# Altium PCB R6.PcbDoc (part 1 of 2)
Units mm, origin at the board's own origin, x right, y up, seen from the top; angles counter-clockwise.
Board outline 152.4 x 101.6 mm, 4 copper layers (Top Layer, GND, VDD, Bottom Layer), stack 0.925 mm thick; 92 components, 126 nets, 416 pads, 248 vias.
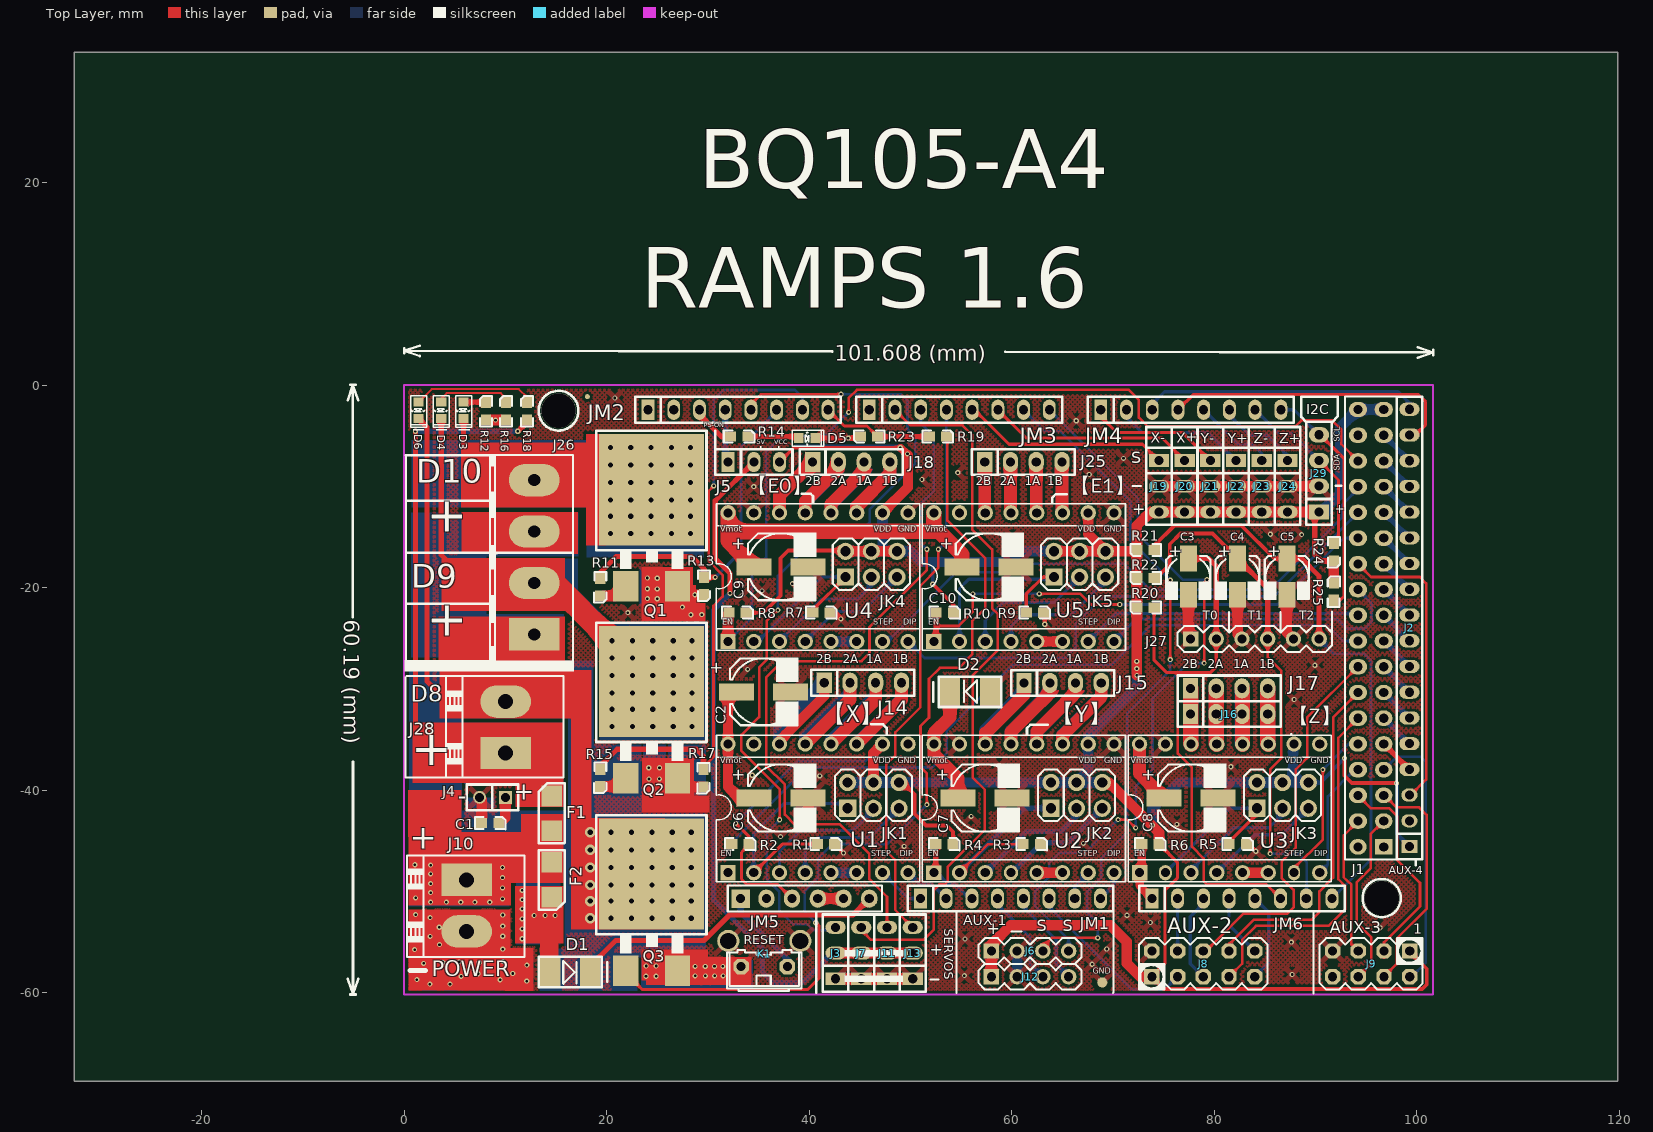
[diagram p0: Top Layer view]
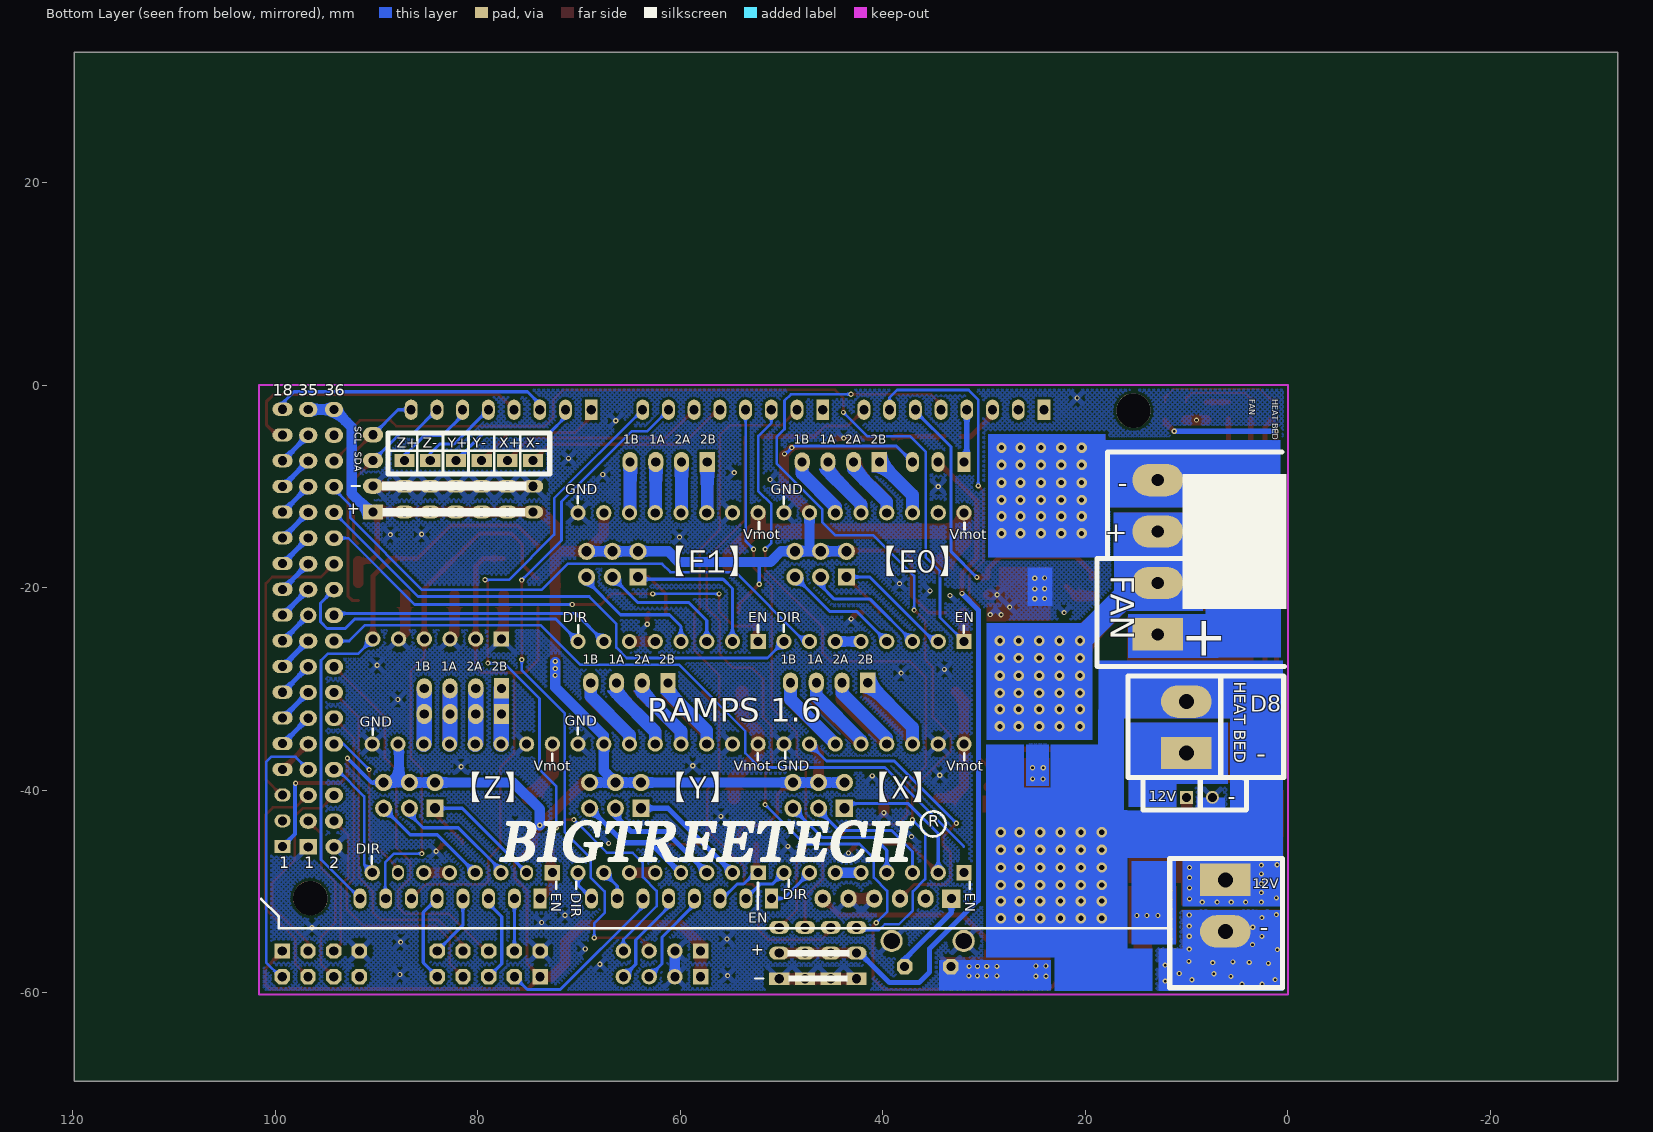
[diagram p1: Bottom Layer view, seen from below]
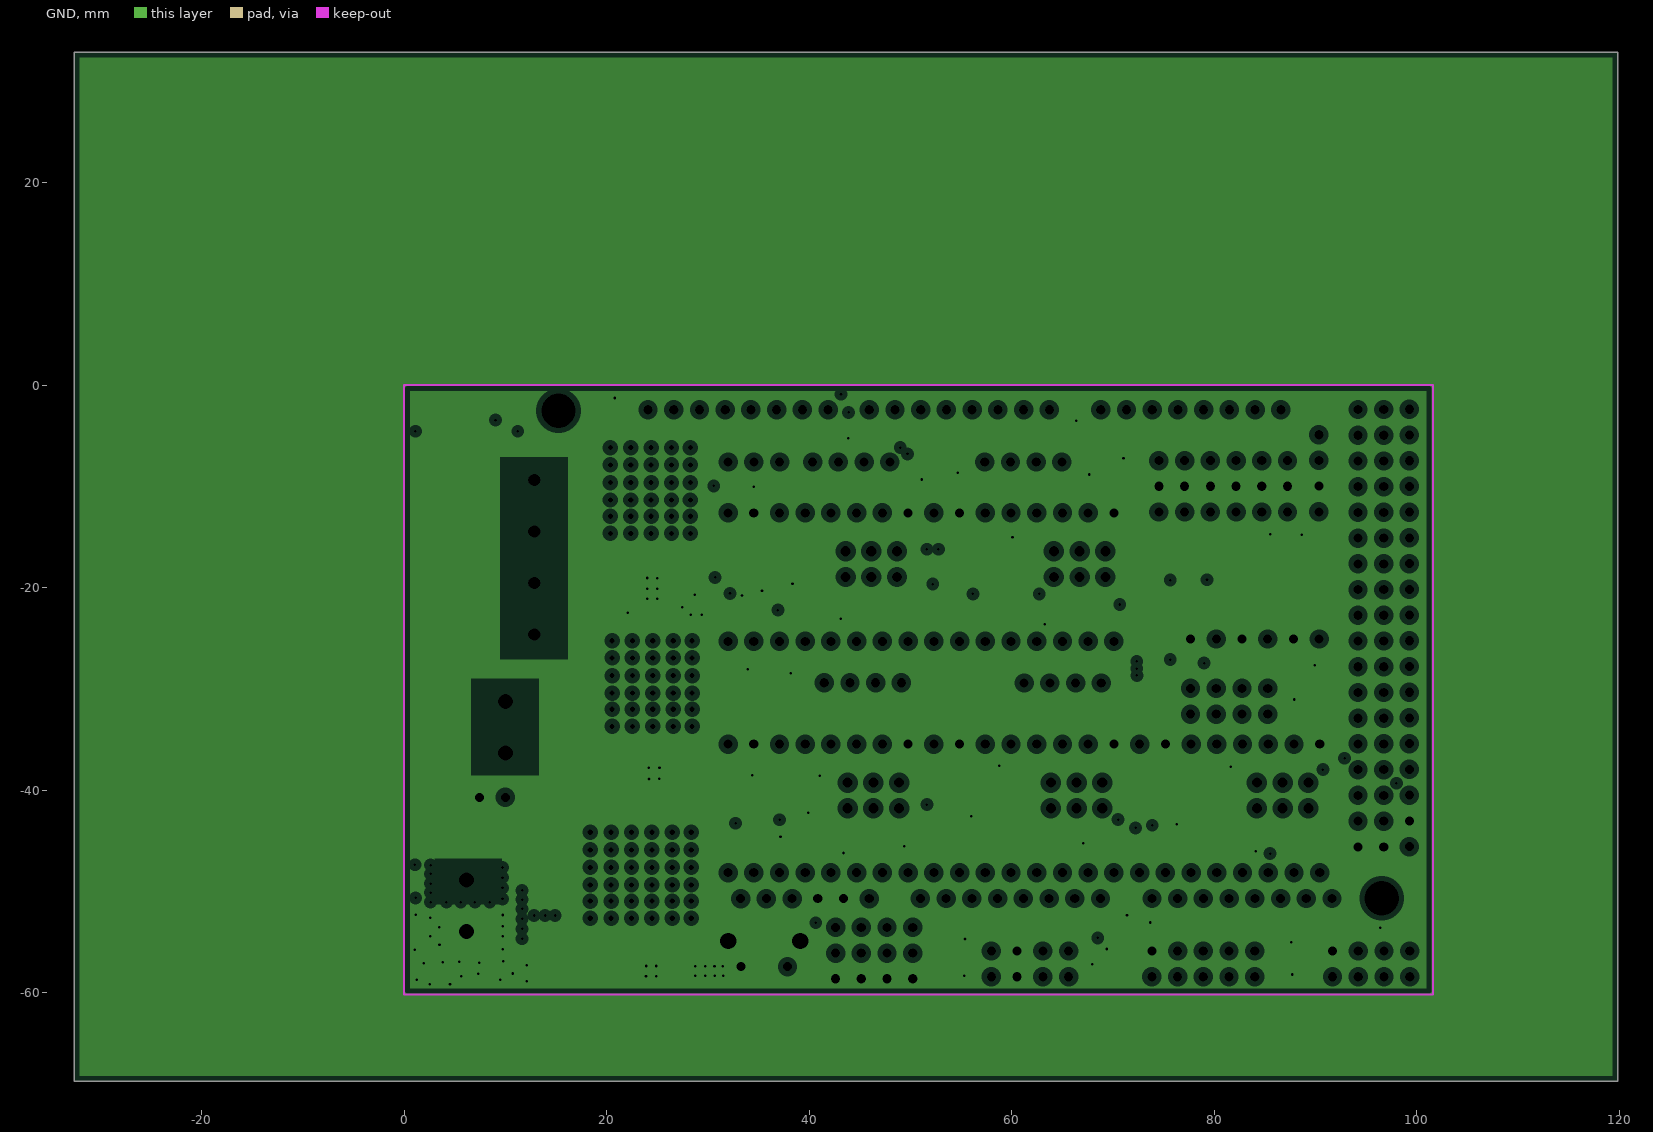
[diagram p2: GND, clearances drawn from the general rule]
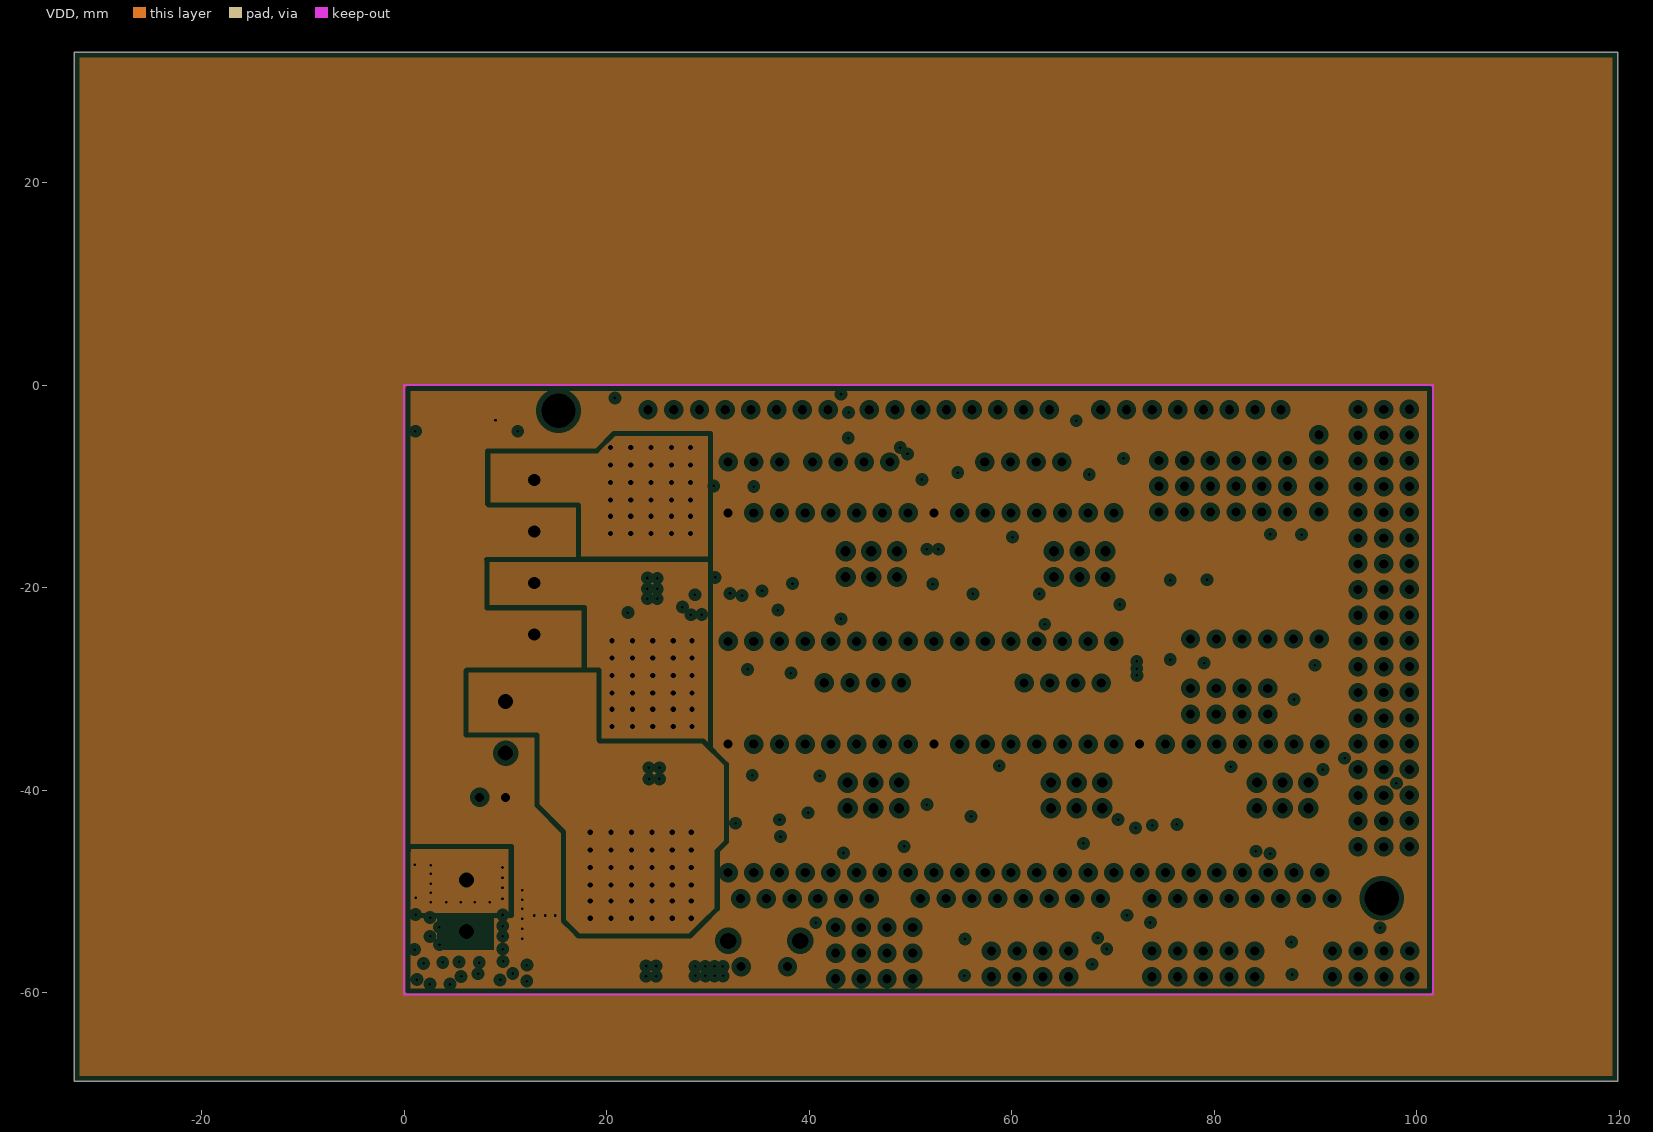
[diagram p3: VDD, clearances drawn from the general rule]

## Layer stack, top to bottom
Top Solder: solder mask 0.0102, Solder Resist, Dk 3.5
Top Layer: signal copper 0.0406
Dielectric 1: core 0.254, FR-4, Dk 4.2
GND: plane copper 0.0406, net GND
Dielectric 2: prepreg 0.254, FR-4, Dk 4.2
VDD: plane copper 0.0406, net (Multiple Nets)
Dielectric 3: core 0.254, FR-4, Dk 4.2
Bottom Layer: signal copper 0.0406
Bottom Solder: solder mask 0.0102, Solder Resist, Dk 3.5

## Board outline
-32.573,-68.74 119.827,-68.74 119.827,32.86 -32.573,32.86

## Design rules (kind name [scope] priority, off if disabled: settings)
Clearance Clearance_1 [All] p1: gap=0.254
Clearance [All] p2: gap=0.178
PlaneClearance [All] p1: clearance=0.508
PlaneConnect [All] p1: planeconnectstyle=Relief reliefexpansion=0.508 reliefentries=4 reliefconductorwidth=0.762 reliefairgap=0.254
PolygonConnect [All] p1: connectstyle=Relief reliefconductorwidth=0.508 reliefentries=4 polygonreliefangle="45 Angle" airgapwidth=0.508
RoutingVias [All] p1: holewidth=0.711 width=1.27 viastyle="Through Hole" minholewidth=0.711 minwidth=1.27 maxholewidth=0.711 maxwidth=1.27
SolderMaskExpansion [All] p1: expansion=0.102
Width [All] p1: maxlimit=5.08 minlimit=0.203 preferedwidth=0.254
28 further rules are at their usual default settings.

## Components (designator, comment, footprint, x,y, rotation, side; value= is the part's Value field where it differs from the comment)
C1 "0.1UF" 0603N 7.695,-43.207 r0 top
C2 "35V/100UF" 35V/100UF-2 35.585,-30.328 r90 top
C3 "35V/10UF" 35V/10UF 77.445,-20.701 r180 top
C4 "35V/10UF" 35V/10UF 82.296,-20.701 r180 top
C5 "35V/10UF" 35V/10UF 87.173,-20.701 r180 top
C6 "35V/100UF" 35V/100UF-2 37.338,-40.818 r90 top locked
C7 "35V/100UF" 35V/100UF-2 57.455,-40.818 r90 top locked
C8 "35V/100UF" 35V/100UF-2 77.826,-40.818 r90 top locked
C9 "35V/100UF" 35V/100UF-2 37.338,-17.983 r90 top locked
C10 "35V/100UF" 35V/100UF-2 57.861,-17.983 r90 top locked
D1 "IN4004【M4】" DO-214AC 16.369,-57.974 r0 top
D2 "IN4004【M4】" DO-214AC 55.905,-30.277 r180 top
D3 "LED" LED-0603 5.867,-1.686 r270 top
D4 "LED" LED-0603 3.658,-1.686 r270 top
D5 "LED" LED-0603 38.964,-5.232 r0 top
D6 "LED" LED-0603 1.422,-1.686 r270 top
F1 "MFR1100 【16V 30A】" 1206 14.695,-42.074 r270 top
F2 "MFR500 【30V  5A】" 1206 14.441,-49.065 r90 top
J1 "SIP36" 2.54-36 96.723,-45.593 r90 top locked
J2 "AUX-4" SIP18 99.263,-7.468 r90 top locked
J3 "SER1" SIP3 42.672,-56.121 r90 top locked
J4 "12V-AUX" SIP2 9.276,-40.733 r180 top
J5 "3P" SIP3 34.493,-7.671 r0 top
J6 "SERIAL" 2.54-4 57.988,-55.88 r0 top locked
J7 "SER2" SIP3 45.212,-56.121 r90 top locked
J8 "AUX-2" 2.54-10 73.863,-58.428 r0 top locked
J9 "AUX-3" 2.54-8 99.289,-55.913 r180 top locked
J10 "300V/20A" 5.08-2#1 11.294,-46.452 r270 top
J11 "SER3" SIP3 47.752,-56.121 r90 top locked
J12 "A-OUT" 2.54-4 57.988,-58.42 r0 top locked
J13 "SER4" SIP3 50.292,-56.121 r90 top locked
J14 "X-MOT" SIP4#1 49.098,-29.388 r0 top
J15 "Y-MOT" SIP4#1 68.834,-29.413 r0 top
J16 "Z-MOT" SIP4#1 85.268,-32.487 r0 top locked
J17 "Z-MOT" SIP4#1 85.268,-29.947 r0 top locked
J18 "E0-MOT" SIP4#2 47.955,-7.595 r0 top
J19 "X-" SIP3 74.447,-9.957 r270 top locked
J20 "X+" SIP3 76.987,-9.957 r270 top locked
J21 "Y-" SIP3 79.527,-9.957 r270 top locked
J22 "Y+" SIP3 82.067,-9.957 r270 top locked
J23 "Z-" SIP3 84.607,-9.957 r270 top locked
J24 "Z+" SIP3 87.147,-9.957 r270 top locked
J25 "E1-MOT" SIP4#1 64.948,-7.595 r0 top
J26 "5.08-4" 5.08-4-B 12.848,-24.62 r90 top
J27 "6P" 2.54-6 77.648,-25.07 r0 top locked
J28 "300V/20A" 5.08-2#2 15.146,-38.744 r90 top
J29 "I2C" SIP4#1 90.322,-4.902 r90 top locked
JK1 "JP6" ICSP-6 43.713,-39.192 r0 top
JK2 "JP6" ICSP-6 63.779,-39.192 r0 top
JK3 "JP6" ICSP-6 84.125,-39.192 r0 top
JK4 "JP6" ICSP-6 43.51,-16.358 r0 top
JK5 "JP6" ICSP-6 64.084,-16.358 r0 top
JM1 "8P" SIP8 61.138,-50.673 r180 top locked
JM2 "8P" SIP8 34.239,-2.413 r180 top locked
JM3 "8P" SIP8 56.083,-2.413 r180 top locked
JM4 "8P" SIP8 78.943,-2.413 r180 top locked
JM5 "6P" SIP6 33.223,-50.711 r0 top locked
JM6 "8P" SIP8 83.998,-50.673 r180 top locked
K1 "RESET" K7 35.357,-57.048 r0 top locked
Q1 "STP55NF06" TO-263-M 19.228,-15.824 r0 top locked
Q2 "STP55NF06" TO-263-M 19.228,-34.773 r0 top locked
Q3 "WSK220N04" TO-263-M 19.228,-53.772 r0 top locked
R1 "100K" 0603N 40.843,-45.288 r0 top
R2 "10K" 0603N 32.385,-45.288 r0 top
R3 "100K" 0603N 61.163,-45.288 r0 top
R4 "10K" 0603N 52.527,-45.288 r0 top
R5 "100K" 0603N 81.483,-45.288 r0 top
R6 "10K" 0603N 72.873,-45.288 r0 top
R7 "100K" 0603N 40.386,-22.428 r0 top
R8 "10K" 0603N 32.106,-22.428 r0 top
R9 "100K" 0603N 61.468,-22.428 r0 top
R10 "10K" 0603N 52.553,-22.428 r0 top
R11 "10R" 0603N 19.406,-19.152 r270 top
R12 "1.8K" 0603N 8.026,-3.404 r90 top
R13 "100K" 0603N 29.642,-19.025 r270 top
R14 "1K" 0603N 32.258,-5.031 r0 top
R15 "10R" 0603N 19.406,-37.973 r270 top
R16 "1.8K" 0603N 10.008,-3.404 r90 top
R17 "100K" 0603N 29.591,-37.998 r270 top
R18 "1.8K" 0603N 12.09,-3.404 r90 top
R19 "10R" 0603N 51.892,-5.031 r0 top
R20 "4.7K" 0603N 74.016,-22.022 r180 top
R21 "4.7K" 0603N 74.016,-16.332 r180 top
R22 "4.7K" 0603N 74.016,-19.101 r180 top
R23 "100K" 0603N 46.711,-5.132 r180 top
R24 "4.7K" 0603N 91.846,-15.697 r270 top
R25 "4.7K" 0603N 91.745,-21.209 r90 top
U1 "A4988" A4988-2#1 39.98,-41.834 r0 top locked
U2 "A4988" A4988-2#2 60.3,-41.834 r0 top locked
U3 "A4988" A4988-2#3 80.62,-41.834 r0 top locked
U4 "A4988" A4988-2#1 39.98,-18.999 r0 top locked
U5 "A4988" A4988-2#1 60.3,-18.999 r0 top locked

## Footprints (in the part's own frame and the unit in brackets; to place one, negate y for a bottom-side part, rotate by r counter-clockwise, add the part's x,y. Pads: shape width x height; smd on the part's side, far side on the other; paste and mask are expansions set on the pad)
2.54-4 [mil] "J?"
  rect 60x60 hole 35.43: 1(0,0)
  round 60 hole 35.43: 2(100,0) 3(200,0) 4(300,0)
  silkscreen extent -50,-50 350,50
2.54-6 [mil] "J?"
  rect 60x60 hole 35: 1(0,0)
  round 60 hole 35: 2(100,0) 3(200,0) 4(300,0) 5(400,0) 6(500,0)
  silkscreen extent -50,-50 550,50
2.54-8 [mil] "J?"
  rect 60x60 hole 35.43: 1(0,-1.3)
  oct 60x60 hole 35.43: 2(0,98.7) 3(100,-1.3) 4(100,98.7) 5(200,-1.3) 6(200,98.7) 7(300,-1.3) 8(300,98.7)
  silkscreen extent -50,-51 350,149
2.54-10 [mil] "J?"
  rect 60x60 hole 35.43: 1(-1.5,0.3)
  oct 60x60 hole 35.43: 2(-1.5,100.3) 3(98.5,0.3) 4(98.5,100.3) 5(198.5,0.3) 6(198.5,100.3) 7(298.5,0.3) 8(298.5,100.3) 9(398.5,0.3) 10(398.5,100.3)
  silkscreen extent -52,-50 448,150
2.54-36 [mm] "J?"
  rect 1.524x1.7 hole 0.9: 1(0,0)
  oval 1.524x1.7 hole 0.9: 2(0,2.54) 3(2.54,0) 5(5.08,0) 7(7.62,0) 9(10.16,0) 11(12.7,0) 13(15.24,0) 15(17.78,0)
  oval 1.524x1.8 hole 0.9: 4(2.54,2.54) 6(5.08,2.54) 8(7.62,2.54) 10(10.16,2.54) 12(12.7,2.54) 14(15.24,2.54) 16(17.78,2.54) 17(20.32,0) 18(20.32,2.54) 20(22.86,2.54) 21(25.4,0) 22(25.4,2.54) 23(27.94,0) 24(27.94,2.54) 25(30.48,0) 26(30.48,2.54) 27(33.02,0) 28(33.02,2.54) 29(35.56,0) 30(35.56,2.54) 31(38.1,0) 32(38.1,2.54) 33(40.64,0) 34(40.64,2.54) 35(43.18,0) 36(43.18,2.54)
  oval 1.524x1.6 hole 0.9: 19(22.86,0)
  silkscreen extent -1.27,-1.27 44.45,3.81
5.08-2#1 [mm] "J?"
  rect 3.2x5 hole 1.5: 1(2.413,-5.133)
  oval 3.2x5 hole 1.5: 2(7.493,-5.133)
  silkscreen extent 0,-11 10,0.6
5.08-2#2 [mm] "J?"
  rect 3.2x5 hole 1.5: 1(2.413,5.133)
  oval 3.2x5 hole 1.5: 2(7.493,5.133)
  silkscreen extent 0,-0.6 10,11
5.08-4-B [mm] "J?"
  rect 3.2x5 hole 1.2: 1(0,0)
  oval 3.2x5 hole 1.2: 2(5.08,0) 3(10.16,0) 4(15.24,0)
  silkscreen extent -2.69,-3.81 17.73,4.42
35V/10UF [mil] "C?"
  rect 66x100 smd: 1(0.5,-140.4) 2(0.5,-0.4)
  silkscreen extent -86,-150 87,20
35V/100UF-2 [mil] "C?"
  rect 66x136 smd: 1(1.5,109.7) 2(1.5,-100.3)
  silkscreen extent -130,-132 135,134
0603N [mm]
  rect 1.1x1 smd: 1(-0.044,-0.041) 2(1.676,-0.051)
  silkscreen extent -0.7,-0.65 2.32,0.55
1206 [mil]
  rect 80x80 smd: 1(-59,-5) 2(76,-5)
  silkscreen extent -108,-56 124,46
A4988-2#1 [mm] "U?"
  rect 1.51x1.51 hole 0.9: 1(-7.999,-6.313)
  round 1.51 hole 0.9: 2(-5.459,-6.313) 3(-2.919,-6.313) 4(-0.379,-6.313) 5(2.161,-6.313) 6(4.701,-6.313) 7(7.241,-6.313) 8(9.781,-6.313) 9(9.781,6.387) 10(7.241,6.387) 11(4.701,6.387) 12(2.161,6.387) 13(-0.379,6.387) 14(-2.919,6.387) 15(-5.459,6.387) 16(-7.999,6.387)
  silkscreen extent -9.14,-7.2 10.92,7.28
A4988-2#2 [mm] "U?"
  rect 1.5x1.4 hole 0.9: 1(-7.999,-6.313)
  round 1.51 hole 0.9: 2(-5.459,-6.313) 3(-2.919,-6.313) 6(4.701,-6.313) 7(7.241,-6.313) 8(9.781,-6.313) 9(9.781,6.387) 10(7.241,6.387) 11(4.701,6.387) 12(2.161,6.387) 13(-0.379,6.387) 14(-2.919,6.387) 15(-5.459,6.387) 16(-7.999,6.387)
  oval 1.4x1.51 hole 0.9: 4(-0.379,-6.313) 5(2.161,-6.313)
  silkscreen extent -9.14,-7.2 10.92,7.28
A4988-2#3 [mm] "U?"
  rect 1.51x1.51 hole 0.9: 1(-7.999,-6.313)
  oval 1.3x1.51 hole 0.9: 2(-5.459,-6.313)
  round 1.51 hole 0.9: 3(-2.919,-6.313) 4(-0.379,-6.313) 5(2.161,-6.313) 6(4.701,-6.313) 8(9.781,-6.313) 9(9.781,6.387) 10(7.241,6.387) 11(4.701,6.387) 12(2.161,6.387) 13(-0.379,6.387) 14(-2.919,6.387) 15(-5.459,6.387) 16(-7.999,6.387)
  oval 1.2x1.51 hole 0.9: 7(7.241,-6.313)
  silkscreen extent -9.14,-7.2 10.92,7.28
DO-214AC [mm] "D?"
  rect 2x2.8 smd: 1(-1.948,0.009) 2(2.015,0.009)
  silkscreen extent -3.07,-1.49 3.67,1.51
ICSP-6 [mm] "J?"
  rect 1.7x1.7 hole 1: 1(0.076,-2.596)
  round 1.7 hole 1: 2(0.076,-0.056) 3(2.616,-2.596) 4(2.616,-0.056) 5(5.156,-2.596) 6(5.156,-0.056)
  silkscreen extent -1.19,-3.87 6.43,1.21
K7 [mil] "K?"
  round 86 hole 63: 0(-132,85.1) 0(148,85.1)
  oct 60x60 hole 35.43: 1(-82,-14.9) 2(98,-14.9)
  Top Layer lines w12: 83,0.1 98,-14.9
  silkscreen extent -137,-110 153,50
LED-0603 [mm]
  rect 0.9x1 smd: 1(0,0) 2(1.626,0)
  silkscreen extent -0.64,-0.79 2.46,0.79
SIP2 [mil] "J?"
  rect 50x50 hole 35.43: 1(-28,-1)
  round 50 hole 35.43: 2(72,-1)
  silkscreen extent -78,-51 122,49
SIP3 [mm] "J?"
  rect 1.27x2 hole 0.9: 1(-2.502,0.076)
  oval 1.27x2 hole 0.9: 2(0.038,0.076) 3(2.578,0.076)
  silkscreen extent -3.77,-1.19 3.85,1.35
SIP4#1 [mm] "J?"
  rect 1.5x2 hole 0.9: 1(-7.62,0)
  oval 1.5x2 hole 0.9: 2(-5.08,0) 3(-2.54,0) 4(0,0)
  silkscreen extent -8.89,-1.27 1.27,1.27
SIP4#2 [mm] "J?"
  rect 1.5x2 hole 0.9: 1(-7.62,0)
  oval 1.5x2 hole 0.9: 2(-5.08,0)
  oval 1.5x1.9 hole 0.9: 3(-2.54,0) 4(0,0)
  silkscreen extent -8.89,-1.27 1.27,1.27
SIP6 [mm] "J?"
  rect 1.8x1.8 hole 0.9: 1(0,0)
  oval 1.6x1.8 hole 0.9: 2(2.54,0) 3(5.08,0) 4(7.62,0) 5(10.16,0) 6(12.7,0)
  silkscreen extent -1.27,-1.28 13.97,1.28
SIP8 [mm] "J?"
  rect 1.27x2 hole 0.9: 1(10.16,0.025)
  oval 1.27x2 hole 0.9: 2(7.62,0.025) 3(5.08,0.025) 4(2.54,0.025) 5(0,0.025) 6(-2.54,0.025) 7(-5.08,0.025) 8(-7.62,0.025)
  silkscreen extent -8.89,-1.24 11.43,1.3
SIP18 [mm]
  rect 1.3x1.6 hole 0.9: 1(-38.1,0)
  oval 1.3x1.6 hole 0.9: 2(-35.56,0) 3(-33.02,0)
  oval 1.3x2 hole 0.9: 4(-30.48,0) 5(-27.94,0) 6(-25.4,0) 7(-22.86,0) 8(-20.32,0) 9(-17.78,0) 10(-15.24,0) 11(-12.7,0) 12(-10.16,0) 13(-7.62,0) 14(-5.08,0) 15(-2.54,0) 16(0,0) 17(2.54,0) 18(5.08,0)
  silkscreen extent -39.37,-1.27 6.33,1.27
TO-263-M [mm] "Q?"
  rect 10.4x11 smd: D(5.197,5.499)
  rect 2.5x3 smd: G(2.654,-4.056) S(7.77,-4.056)
  silkscreen extent -0.25,-2.35 10.62,11.31

## Part data
C1: library part CAP
C2 C3 C4 C5 C6 C7 C8 C9 C10: library part C
D1 D2: library part DIODE
F1 F2: library part FUSE
J2: library part SIP18
J3 J5 J7 J11 J13 J19 J20 J21 J22 J23 J24: library part SIP3
J4 J10 J28: library part SIP2
J6 J12 J14 J15 J16 J17 J18 J25 J26 J29: library part SIP4
J8: library part SIP10
J9 JM1 JM2 JM3 JM4 JM6: library part SIP8
J27 JM5: library part SIP6
K1: library part K3
Q1 Q2 Q3: library part NMOS
R1 R2 R3 R4 R5 R6 R7 R8 R9 R10 R11 R12 R13 R14 R15 R16 R17 R18 R19 R20 R21 R22 R23 R24 R25: library part RES

## Free pads (board coordinates)
  round 3.404 hole 3.404: 1(15.24,-2.527) 2(96.52,-50.66)
  round 1 smd: 1(68.936,-58.979)
  round 0.5 smd: A(18.085,-1.143)

## Via types
v1: diameter 0.508, hole 0.254, Top Layer to Bottom Layer, 152 vias
v2: diameter 1.016, hole 0.508, Top Layer to Bottom Layer, 96 vias

## Nets (pads, with @x,y where several pads share a name; then routed paths per layer and width w, separated by ;. In a path a pad name is that pad's centre, name@x,y a point inside that pad or via, vN(x,y) a via of type N, cw(c..) or ccw(c..) an arc to the next point about the centre after c; other vN are vias at no path point)
1A: J16.3 J17.3 U3.12 | length 11
  Top Layer w1.524: J17.3@82.728,-29.947 82.781,-30 U3.12@82.781,-35.447
  Bottom Layer w1.524: J17.3@82.728,-29.947 J16.3@82.728,-32.487 82.728,-35.394 U3.12@82.781,-35.447
1B: J16.4 J17.4 U3.11 | length 11
  Top Layer w1.524: J17.4@85.268,-29.947 J16.4@85.268,-32.487 85.268,-35.394 U3.11@85.321,-35.447
  Bottom Layer w1.524: J17.4@85.268,-29.947 J16.4@85.268,-32.487 85.268,-35.394 U3.11@85.321,-35.447
2A: J16.2 J17.2 U3.13 | length 11
  Top Layer w1.524: J17.2@80.188,-29.947 J16.2@80.188,-32.487 80.188,-35.394 U3.13@80.241,-35.447
  Bottom Layer w1.524: J17.2@80.188,-29.947 J16.2@80.188,-32.487 80.188,-35.394 U3.13@80.241,-35.447
2B: J16.1 J17.1 U3.14 | length 11
  Top Layer w1.524: J17.1@77.648,-29.947 J16.1@77.648,-32.487 77.648,-35.394 U3.14@77.701,-35.447
  Bottom Layer w1.524: J17.1@77.648,-29.947 J16.1@77.648,-32.487 77.648,-35.394 U3.14@77.701,-35.447
+5V: J3.2 J5.2 J7.2 J11.2 J13.2 | length 71.7
  Top Layer w0.508: v1(32.17,-20.571) 32.17,-18.589 30.711,-17.129 30.711,-11.415 J5.2@34.531,-7.595
  Top Layer w1.016: J3.2@42.596,-56.083 J7.2@45.136,-56.083 J11.2@47.676,-56.083 J13.2@50.216,-56.083
  Bottom Layer w0.508: v1(32.17,-20.571) 32.17,-20.592 30.558,-22.204 30.558,-50.891 30.617,-50.891 35.38,-55.654 35.38,-57.969 36.418,-59.006 39.343,-59.006 42.267,-56.083 J3.2@42.596,-56.083
+12V: C1.2 C2.1 C6.1 C7.1 C8.1 C9.1 C10.1 D1.1 D2.2 F2.1 J4.1 J26.1 J26.3 R12.1 R16.1 U1.16 U2.16 U3.16 U4.16 U5.16 | length 99.6
  Top Layer w1.016: R12.1@8.067,-3.447 R16.1@10.048,-3.447 ; C1.2@9.371,-43.258 9.441,-43.258 9.986,-42.714 9.986,-40.71 J4.1@9.988,-40.708 ; F2.1@13.913,-50.563 13.913,-53.536 ; 14.119,-53.742 13.913,-53.536 ; D1.1@14.422,-57.965 13.913,-57.457 13.913,-53.536 ; C2.1@32.799,-30.29 31.981,-31.108 U1.16@31.981,-35.447 31.981,-39.652 33.109,-40.78 C6.1@34.552,-40.78
  Top Layer w1.27: D2.2@53.891,-30.286 53.891,-32.8 52.301,-34.389 U2.16@52.301,-35.447 52.301,-36.447 54.668,-38.814 C7.1@54.668,-40.78 ; U3.16@72.621,-35.447 72.621,-38.361 C8.1@75.039,-40.78
  Top Layer w1.524: U4.16@31.981,-12.612 31.981,-14.453 ; C9.1@34.552,-17.945 31.981,-15.374 31.981,-14.453 ; 52.045,-14.453 31.981,-14.453 ; U5.16@52.301,-12.612 52.301,-14.453 52.799,-14.453 55.075,-16.728 C10.1@55.075,-17.945
  Bottom Layer w2.54: J26.1@12.848,-24.62 7.468,-24.62 5.691,-22.844 5.691,-16.213 7.444,-14.46 J26.3@12.848,-14.46
  other v1: 11.651,-54.665 11.651,-53.695 11.651,-52.715 12.836,-52.377 13.912,-52.377 14.906,-52.377 11.651,-51.727 11.651,-50.802 11.651,-49.896 9.017,-3.454
+12V2: F1.1 J28.1 R18.1 | length 46.3
  Top Layer w0.508: v1(1.108,-4.564) 1.108,-33.715 1.436,-34.043 ; v1(11.221,-4.56) 11.27,-4.56 12.131,-3.698 R18.1@12.131,-3.447
  Top Layer w1.27: 12.83,-35.694 13.913,-36.777 F1.1@13.913,-40.238
  Bottom Layer w0.254: v1@1.095,-4.539 v1@1.109,-4.552
  Bottom Layer w0.508: v1@1.109,-4.552 1.116,-4.56 v1(11.221,-4.56)
A3: J6.3 JM3.7 | length 69
  Top Layer w0.254: J6.3@63.068,-55.88 63.068,-55.474 63.955,-54.586 v1(68.488,-54.586) ; v1(75.641,-27.102) v1(75.641,-19.253)
  Bottom Layer w0.254: JM3.7@61.163,-2.438 63.297,-4.572 64.797,-4.572 71.717,-11.493 71.717,-15.329 v1(75.641,-19.253) ; v1(68.488,-54.586) 68.488,-53.148 67.452,-52.112 67.452,-49.998 68.834,-48.616 68.834,-46.701 71.419,-44.116 71.419,-32.385 75.641,-28.163 v1(75.641,-27.102)
A4: J6.4 JM3.8 | length 74.3
  Top Layer w0.254: v1(70.502,-42.899) 71.4,-42.899 v1(72.228,-43.727) ; v1(78.994,-27.457) 78.994,-19.507 v1(79.273,-19.228)
  Bottom Layer w0.254: JM3.8@63.703,-2.438 72.439,-11.174 72.439,-14.759 76.908,-19.228 v1(79.273,-19.228) ; J6.4@65.608,-55.88 65.608,-54.737 62.332,-51.46 62.332,-49.936 63.678,-48.59 63.678,-47.196 64.697,-46.177 67.224,-46.177 v1(70.502,-42.899) ; v1(72.228,-43.727) 72.228,-39.627 73.892,-37.962 73.892,-30.959 77.394,-27.457 v1(78.994,-27.457)
A5: J8.3 JM1.6 | length 17.4
  Bottom Layer w0.305: JM1.6@63.678,-50.698 63.678,-51.537 71.831,-59.69 75.095,-59.69 J8.3@76.365,-58.42
A9: J8.4 JM6.2 | length 5.2
  Bottom Layer w0.305: J8.4@76.365,-55.88 76.378,-55.867 JM6.2@76.378,-50.698
A10: J8.5 JM6.3 | length 8.8
  Bottom Layer w0.305: J8.5@78.905,-58.42 77.622,-57.137 77.622,-52.502 78.918,-51.206 JM6.3@78.918,-50.698
A11: J8.10 JM6.4 | length 6.2
  Bottom Layer w0.305: JM6.4@81.458,-50.698 81.458,-53.353 J8.10@83.985,-55.88
A12: J8.9 JM6.5 | length 8.9
  Bottom Layer w0.305: J8.9@83.985,-58.42 85.369,-57.036 85.369,-52.07 JM6.5@83.998,-50.698
AM-VIN: D1.2 JM5.6 | length 30.9
  Top Layer w0.508: D1.2@18.384,-57.965 18.384,-57.349 20.894,-54.839 29.616,-54.839 32.13,-52.324 44.31,-52.324 JM5.6@45.923,-50.711
D1: J12.4 JM1.5 | length 9.6
  Bottom Layer w0.305: JM1.5@61.138,-50.698 61.138,-51.537 64.389,-54.788 64.389,-57.201 J12.4@65.608,-58.42
D2: J12.3 JM1.4 | length 9.6
  Bottom Layer w0.305: JM1.4@58.598,-50.698 58.598,-51.308 61.798,-54.508 61.798,-57.15 J12.3@63.068,-58.42
D4: J13.3 JM3.4 | length 54.6
  Top Layer w0.254: J13.3@50.216,-53.543 48.489,-51.816 48.489,-46.873 47.601,-45.986 47.601,-37.46 48.491,-36.569 48.491,-34.285 50.96,-31.817 50.96,-19.83 52.756,-18.034 v1(52.756,-16.205)
  Bottom Layer w0.254: v1(52.756,-16.205) 53.543,-15.418 JM3.4@53.543,-2.438
D5: J11.3 JM3.3 | length 71.1
  Top Layer w0.254: J11.3@47.676,-53.543 47.676,-50.523 45.925,-48.772 45.925,-46.28 43.02,-43.375 38.556,-43.375 37.582,-42.402 37.582,-39.451 35.733,-37.602 35.733,-28.882 37.359,-27.256 45.168,-27.256 45.95,-26.474 45.95,-23.9 51.613,-18.237 v1(51.613,-16.205)
  Bottom Layer w0.254: JM3.3@51.003,-2.438 51.003,-3.759 52.273,-5.029 52.273,-10.49 51.003,-11.76 51.003,-15.596 v1(51.613,-16.205)
D6: J7.3 JM3.2 | length 71.2
  Top Layer w0.254: J7.3@45.136,-53.543 45.136,-53.823 46.101,-54.788 51.278,-54.788 52.295,-53.771 52.295,-49.847 52.845,-49.297 53.393,-49.297 53.668,-49.022 53.668,-47.58 57.328,-43.92 57.328,-39.954 56.128,-38.754 56.128,-28.657 58.623,-26.162 58.623,-22.626 58.064,-22.067 58.064,-16.232 56.079,-14.247 56.079,-4.906 55.146,-3.972 49.997,-3.972 JM3.2@48.463,-2.438
  Bottom Layer w0.254: J7.3@45.136,-53.543 J7.3@45.136,-53.111
D8: JM2.8 R19.1 R23.1 | length 11.1
  Top Layer w0.305: JM2.8@41.859,-2.438 43.459,-4.039 45.701,-4.039 R23.1@46.754,-5.092
  Top Layer w0.508: R23.1@46.754,-5.092 51.829,-5.092 R19.1@51.849,-5.071
D9: JM2.7 R15.1 R17.1 | length 61
  Top Layer w0.254: R17.1@29.55,-37.714 30.541,-36.723 30.541,-21.791 31.451,-20.881 31.451,-18.768 30.076,-17.393 30.076,-10.448 v1(30.572,-9.952)
  Top Layer w0.508: R15.1@19.365,-37.929 19.365,-37.624 21.033,-35.956 28.857,-35.956 29.55,-36.649 R17.1@29.55,-37.714
  Bottom Layer w0.254: v1(30.572,-9.952) 30.572,-1.432 31.521,-0.483 38.583,-0.483 39.319,-1.219 JM2.7@39.319,-2.438
D10: JM2.6 R11.1 R13.1 | length 33
  Top Layer w0.508: R11.1@19.365,-19.108 19.365,-18.512 20.944,-16.933 28.388,-16.933 29.601,-18.146 R13.1@29.601,-18.981 v1@30.702,-18.981
  Bottom Layer w0.305: v1(30.702,-18.995) 33.249,-16.449 33.249,-6.121 36.779,-2.591 JM2.6@36.779,-2.438
D11: J3.3 JM2.5 | length 85.7
  Top Layer w0.254: JM2.5@34.239,-2.438 34.239,-1.9 35.232,-0.908 v1(43.132,-0.908) ; v1@36.881,-22.2 35.814,-23.266 35.814,-27.097 35.046,-27.865 35.046,-32.778 33.294,-34.53 33.294,-36.117 37.074,-39.898 v1(37.074,-42.925)
  Bottom Layer w0.254: v1(36.906,-22.225) 36.906,-18.85 40.922,-14.834 44.679,-14.834 45.974,-13.538 45.974,-12.253 50.476,-7.751 50.476,-5.13 49.699,-4.353 49.699,-1.526 49.081,-0.908 v1(43.132,-0.908) ; v1(37.074,-42.925) 35.814,-44.185 35.814,-48.768 37.033,-49.987 37.033,-51.867 38.405,-53.238 39.802,-53.238 40.386,-53.823 42.316,-53.823 J3.3@42.596,-53.543
D16: J2.18 JM4.3 | length 27.5
  Bottom Layer w0.305: JM4.3@73.863,-2.438 73.863,-1.88 75.082,-0.66 98.146,-0.66 99.263,-1.778 J2.18@99.263,-2.388
D17: J2.17 JM4.4 | length 29.7
  Top Layer w0.305: JM4.4@76.403,-2.438 77.902,-0.94 100.152,-0.94 100.863,-1.651 100.863,-3.912 99.847,-4.928 J2.17@99.263,-4.928
D23: J1.33 J2.16 | length 3.6
  Bottom Layer w0.305: J2.16@99.238,-7.468 J2.16@99.263,-7.468
  Bottom Layer w0.508: J1.33@96.723,-4.953 J2.16@99.238,-7.468
D25: J1.31 J2.15 | length 3.6
  Bottom Layer w0.305: J2.15@99.238,-10.008 J2.15@99.263,-10.008
  Bottom Layer w0.508: J1.31@96.723,-7.493 J2.15@99.238,-10.008
D27: J1.29 J2.14 | length 3.6
  Bottom Layer w0.305: J2.14@99.238,-12.548 J2.14@99.263,-12.548
  Bottom Layer w0.508: J1.29@96.723,-10.033 J2.14@99.238,-12.548
D29: J1.27 J2.13 | length 3.6
  Bottom Layer w0.305: J2.13@99.238,-15.088 J2.13@99.263,-15.088
  Bottom Layer w0.508: J1.27@96.723,-12.573 J2.13@99.238,-15.088
D31: J1.25 J2.12 | length 3.6
  Bottom Layer w0.305: J2.12@99.238,-17.628 J2.12@99.263,-17.628
  Bottom Layer w0.508: J1.25@96.723,-15.113 J2.12@99.238,-17.628
D32: J1.24 J2.3 | length 29.2
  Top Layer w0.254: J1.24@94.183,-17.653 95.479,-18.948 100.279,-18.948 100.914,-19.583 100.914,-38.964 99.39,-40.488 J2.3@99.263,-40.488
D33: J1.23 J2.11 | length 3.6
  Bottom Layer w0.305: J2.11@99.238,-20.168 J2.11@99.263,-20.168
  Bottom Layer w0.508: J1.23@96.723,-17.653 J2.11@99.238,-20.168
D35: J1.21 J2.10 | length 3.6
  Bottom Layer w0.305: J2.10@99.238,-22.708 J2.10@99.263,-22.708
  Bottom Layer w0.508: J1.21@96.723,-20.193 J2.10@99.238,-22.708
D37: J1.19 J2.9 | length 3.6
  Bottom Layer w0.305: J2.9@99.238,-25.248 J2.9@99.263,-25.248
  Bottom Layer w0.508: J1.19@96.723,-22.733 J2.9@99.238,-25.248
D39: J1.17 J2.8 | length 3.6
  Bottom Layer w0.305: J1.17@96.723,-25.273 J1.17@96.749,-25.273
  Bottom Layer w0.508: J1.17@96.749,-25.273 J2.8@99.263,-27.788
D40: J1.16 J8.6 | length 38.1
  Top Layer w0.254: J8.6@78.905,-55.88 79.174,-55.88 82.857,-52.197 87.203,-52.197 87.823,-51.578 87.823,-49.842 86.648,-48.668 86.648,-47.05 88.036,-45.662 88.036,-37.948 89.154,-36.83 89.154,-32.842 J1.16@94.183,-27.813
D41: J1.15 J2.7 | length 3.6
  Bottom Layer w0.305: J2.7@99.238,-30.328 J2.7@99.263,-30.328
  Bottom Layer w0.508: J1.15@96.723,-27.813 J2.7@99.238,-30.328
D42: J1.14 J8.8 | length 34.2
  Top Layer w0.254: J8.8@81.445,-55.88 81.445,-55.232 83.874,-52.803 89.589,-52.803 90.373,-52.019 90.373,-49.987 91.725,-48.636 91.725,-32.812 J1.14@94.183,-30.353
D43: J1.13 J2.6 | length 3.6
  Bottom Layer w0.305: J2.6@99.238,-32.868 J2.6@99.263,-32.868
  Bottom Layer w0.508: J1.13@96.723,-30.353 J2.6@99.238,-32.868
D44: J1.12 J8.7 | length 35.6
  Top Layer w0.254: J8.7@81.445,-58.42 82.753,-57.112 82.753,-54.762 84.113,-53.403 91.276,-53.403 92.932,-51.746 92.932,-49.459 92.915,-49.459 92.233,-48.777 92.233,-34.844 J1.12@94.183,-32.893
D45: J1.11 J2.5 | length 3.6
  Bottom Layer w0.305: J2.5@99.238,-35.408 J2.5@99.263,-35.408
  Bottom Layer w0.508: J1.11@96.723,-32.893 J2.5@99.238,-35.408
D47: J1.9 J2.4 | length 3.6
  Top Layer w0.508: J1.9@96.723,-35.433 J2.4@99.238,-37.948
  Bottom Layer w0.305: J2.4@99.238,-37.948 J2.4@99.263,-37.948
D49: J1.7 J9.2 | length 26.9
  Bottom Layer w0.254: J1.7@96.723,-37.973 97.976,-36.72 100.386,-36.72 100.889,-37.223 100.889,-57.023 99.492,-58.42 J9.2@99.289,-58.42
D53: J1.3 J9.6 | length 17.6
  Top Layer w0.254: J9.6@94.209,-58.42 95.479,-57.15 95.479,-54.508 94.074,-53.104 94.074,-49.08 95.428,-47.726 95.428,-44.348 J1.3@96.723,-43.053
E0-DIR: J1.28 U4.8 | length 52.4
  Bottom Layer w0.254: U4.8@49.761,-25.312 51.398,-26.949 65.278,-26.949 66.294,-25.933 66.294,-23.571 68.986,-20.879 85.877,-20.879 J1.28@94.183,-12.573
E0-EN: J1.32 R8.1 U4.1 | length 90.2
  Top Layer w0.254: v1(43.891,-2.692) 43.891,-1.295 44.705,-0.482 71.551,-0.482 72.542,-1.473 72.542,-3.2 73.406,-4.064 88.011,-4.064 88.595,-3.48 91.618,-3.48 92.532,-4.394 92.532,-5.842 J1.32@94.183,-7.493
  Top Layer w1.016: U4.1@31.981,-25.312 31.981,-22.55 R8.1@32.062,-22.469
  Bottom Layer w0.254: U4.1@31.981,-25.312 34.346,-22.947 34.346,-18.384 35.763,-16.967 35.763,-6.563 37.289,-5.037 41.546,-5.037 v1(43.891,-2.692)
E0-STEP: J1.30 U4.7 | length 56.3
  Bottom Layer w0.254: U4.7@47.221,-25.312 47.713,-25.312 54.554,-18.471 60.955,-18.471 61.773,-17.653 71.12,-17.653 73.685,-20.218 85.471,-20.218 92.597,-13.093 92.597,-11.849 93.945,-10.501 93.945,-10.271 J1.30@94.183,-10.033
E1-DIR: J1.22 U5.8 | length 30.7
  Bottom Layer w0.305: U5.8@70.081,-25.312 72.288,-23.105 92.142,-23.105 93.066,-24.028 94.869,-24.028 95.504,-23.393 95.504,-21.514 J1.22@94.183,-20.193
E1-EN: J1.26 R10.1 U5.1 | length 50.1
  Top Layer w0.254: 52.509,-23.787 54.75,-23.787 56.159,-22.377 v1(56.159,-20.625) ; v1(62.713,-20.625) 66.777,-20.625 67.818,-21.666 v1(70.663,-21.666)
  Top Layer w0.508: U5.1@52.301,-25.312 52.509,-25.104 52.509,-23.787 R10.1@52.509,-22.469
  Bottom Layer w0.254: v1(56.159,-20.625) v1(62.713,-20.625) ; v1(70.663,-21.666) 86.221,-21.666 92.775,-15.113 J1.26@94.183,-15.113
E1-STEP: J1.20 U5.7 | length 27.9
  Bottom Layer w0.305: U5.7@67.541,-25.312 70.307,-22.546 93.996,-22.546 J1.20@94.183,-22.733
GND: C1.1 C2.2 C3.2 C4.2 C5.2 C6.2 C7.2 C8.2 C9.2 C10.2 D2.1 D5.2 J1.1 J1.2 J2.2 J3.1 J4.2 J6.2 J7.1 J8.2 J9.7 J10.2 J11.1 J12.2 J13.1 J19.2 J20.2 J21.2 J22.2 J23.2 J24.2 J27.1 J27.3 J27.5 J29.2 JM5.4 JM5.5 K1.0 K1.1 pad.1@68.936,-58.979 Q1.S Q2.S Q3.S R1.2 R3.2 R5.2 R7.2 R9.2 R13.2 R17.2 R23.2 U1.9 U1.15 U2.9 U2.15 U3.9 U3.15 U4.9 U4.15 U5.9 U5.15 | length 69.8
  Top Layer w0.305: D2.1@57.027,-31.112 D2.1@57.853,-30.286
  Top Layer w0.381: R1.2@42.52,-45.339 v1(43.383,-46.203) ; R3.2@62.84,-45.542 R3.2@62.84,-45.339 ; R9.2@63.144,-22.479 63.246,-22.581 v1(63.246,-23.622) ; R5.2@83.16,-45.339 83.414,-45.339 v1(84.099,-46.025)
  Top Layer w0.508: Q1.S@26.998,-19.881 Q1.S@27.818,-20.701 ; D5.2@40.589,-5.232 40.599,-5.242 v1(43.856,-5.242) 44.873,-5.242 R23.2@45.034,-5.081 ; R7.2@42.062,-22.479 42.52,-22.479 v1(43.129,-23.089)
  Top Layer w1.016: J4.2@7.448,-40.708 7.651,-40.912 C1.1@7.651,-43.248 ; Q3.S@26.998,-57.828 29.725,-57.828 30.639,-57.828 31.473,-57.828 32.873,-57.828 K1.1@33.274,-57.427 ; Q2.S@26.998,-38.829 27.843,-39.675 R17.2@29.54,-39.675 ; Q1.S@27.818,-20.701 v1(28.702,-20.701) R13.2@29.591,-20.701 ; v1(39.886,-42.233) C6.2@39.886,-40.78 ; JM5.4@40.843,-50.711 JM5.5@43.383,-50.711 ; J3.1@42.596,-58.623 J7.1@45.136,-58.623 J11.1@47.676,-58.623 J13.1@50.216,-58.623 ; J19.2@74.524,-9.995 J20.2@77.064,-9.995 J21.2@79.604,-9.995 J22.2@82.144,-9.995 J23.2@84.684,-9.995 J24.2@87.224,-9.995 90.31,-9.995 J29.2@90.322,-9.982 ; C3.2@77.432,-20.691 77.432,-24.854 J27.1@77.648,-25.07 ; C4.2@82.283,-20.691 82.283,-24.625 J27.3@82.728,-25.07 ; C5.2@87.16,-20.691 87.16,-24.422 J27.5@87.808,-25.07
  Bottom Layer w0.508: J6.2@60.528,-55.88 J6.2@60.528,-55.397
  Bottom Layer w1.016: J12.2@60.528,-58.42 J6.2@60.528,-55.88
  other v1: 4.523,-59.153 2.545,-59.144 12.101,-58.85 9.469,-58.726 1.258,-58.711 5.625,-58.39 23.877,-58.38 24.872,-58.38 28.733,-58.344 29.742,-58.344 30.654,-58.344 31.499,-58.344 55.318,-58.306 87.671,-58.2 7.301,-58.127 10.714,-58.104 28.733,-57.401 29.725,-57.401 30.639,-57.401 31.473,-57.402 23.882,-57.361 24.876,-57.361 12.116,-57.27 67.924,-57.193 1.919,-57.099 7.414,-57.025 3.803,-56.998 5.426,-56.957 9.769,-56.912 1.031,-55.74 9.734,-55.698 69.375,-55.683 3.486,-55.253 87.613,-55.005 55.375,-54.696 2.564,-54.444 9.734,-54.43 96.365,-53.59 3.459,-53.534 9.734,-53.426 73.689,-53.063 2.564,-52.589 71.37,-52.345 9.734,-52.328 1.123,-52.287 49.371,-45.552 67.061,-45.254 37.156,-44.578 76.304,-43.379 55.981,-42.582 24.177,-38.896 25.196,-38.885 41.035,-38.594 34.376,-38.527 24.147,-37.786 25.21,-37.782 81.637,-37.682 58.761,-37.583 87.875,-31.047 38.179,-28.444 33.915,-28.077 89.932,-27.66 28.314,-22.684 29.39,-22.663 22.085,-22.465 27.472,-21.922 24.013,-21.085 24.986,-21.101 33.36,-20.779 35.331,-20.32 24.986,-20.127 24.013,-20.111 38.347,-19.603 24.013,-19.053 24.986,-19.069 60.071,-15.011 88.617,-14.764 85.537,-14.736 34.522,-10.028 51.115,-9.321 67.643,-8.831 54.661,-8.636 71.025,-7.232 66.361,-3.523 20.808,-1.277
MISO: J1.6 J9.3 | length 21.1
  Top Layer w0.254: J1.6@94.183,-40.513 95.437,-41.767 97.251,-41.767 98.04,-42.555 98.04,-46.894 100.303,-49.156 100.303,-51.466 96.749,-55.02 J9.3@96.749,-55.88 J9.3@96.749,-56.54
MOSI: J1.5 J9.4 | length 22.9
  Top Layer w0.254: J1.5@96.723,-40.64 J1.5@96.723,-40.513 96.817,-40.513 97.998,-41.693 100.207,-41.693 100.958,-42.445 100.958,-51.715 98.004,-54.669 98.004,-57.164 J9.4@96.749,-58.42
NetD3_1: D3.1 R12.2 | length 2.2
  Top Layer w0.508: D3.1@5.867,-1.686 8.036,-1.686 R12.2@8.077,-1.727
NetD3_2: D3.2 J26.4 Q1.D | length 23.8
  Top Layer w0.508: D3.2@5.867,-3.311 5.867,-7.064 8.306,-9.503 12.725,-9.503 J26.4@12.848,-9.38 23.48,-9.38 Q1.D@24.425,-10.325
  other v2: 20.358,-14.64 22.367,-14.64 24.378,-14.64 26.398,-14.64 28.266,-14.64 20.358,-12.949 22.367,-12.949 24.378,-12.949 26.398,-12.949 28.266,-12.949 20.358,-11.35 22.367,-11.35 24.378,-11.35 26.398,-11.35 28.266,-11.35 20.358,-9.632 22.367,-9.632 24.378,-9.632 26.398,-9.632 28.266,-9.632 20.358,-7.881 22.367,-7.881 24.378,-7.881 26.398,-7.881 28.266,-7.881 20.358,-6.179 22.367,-6.179 24.378,-6.179 26.398,-6.179 28.266,-6.179
NetD4_1: D4.1 R16.2 | length 7.6
  Top Layer w0.203: D4.1@3.658,-1.686 3.658,-1.346 4.204,-0.8 9.538,-0.8 10.058,-1.321 R16.2@10.058,-1.727
NetD4_2: D4.2 J26.2 Q2.D | length 52.8
  Top Layer w0.381: 4.689,-17.78 6.449,-19.54 J26.2@12.848,-19.54 12.848,-19.49 J26.2@12.815,-19.457
  Top Layer w0.508: D4.2@3.658,-3.311 3.658,-16.749 4.689,-17.78
  Top Layer w2.286: J26.2@12.848,-19.54 14.749,-19.54 20.31,-25.101 20.31,-25.458 22.165,-27.313 Q2.D@24.125,-29.273 ; Q2.D@22.085,-27.495 Q2.D@23.787,-29.197 ; Q2.D@23.482,-29.273 Q2.D@24.125,-29.273 ; Q2.D@24.425,-29.273 Q2.D@24.125,-29.273
  Bottom Layer w2.286: J26.2@12.848,-19.54 14.828,-19.54 v2(20.527,-25.24)
  other v2: 20.527,-33.701 22.536,-33.701 24.547,-33.701 26.568,-33.701 28.435,-33.701 20.527,-32.01 22.536,-32.01 24.547,-32.01 26.568,-32.01 28.435,-32.01 20.527,-30.411 22.536,-30.411 24.547,-30.411 26.568,-30.411 28.435,-30.411 20.527,-28.693 22.536,-28.693 24.547,-28.693 26.568,-28.693 28.435,-28.693 20.527,-26.942 22.536,-26.942 24.547,-26.942 26.568,-26.942 28.435,-26.942 22.536,-25.24 24.547,-25.24 26.568,-25.24 28.435,-25.24
NetD5_1: D5.1 R14.2 | length 5.1
  Top Layer w0.508: R14.2@33.934,-5.081 38.813,-5.081 D5.1@38.964,-5.232
NetD6_1: D6.1 R18.2 | length 12.1
  Top Layer w0.203: D6.1@1.422,-1.686 2.714,-0.394 11.316,-0.394 12.141,-1.219 R18.2@12.141,-1.727
NetD6_2: D6.2 J28.2 Q3.D | length 89.3
  Top Layer w0.508: D6.2@1.422,-3.311 2.269,-4.157 2.269,-29.263 3.619,-30.614 12.83,-30.614
  Top Layer w2.032: 12.83,-30.614 15.563,-30.614 17.469,-32.52 17.469,-43.211 19.423,-45.165 20.293,-46.035 21.227,-46.969 23.121,-46.969 Q3.D@24.425,-48.273
  Bottom Layer w2.54: 12.83,-30.614 15.788,-30.614 17.464,-32.29 17.464,-43.867 17.464,-47.627 17.464,-52.366 17.464,-52.65 17.464,-53.57 17.53,-53.636
  other v2: 18.367,-52.65 20.437,-52.65 22.446,-52.65 24.458,-52.65 26.478,-52.65 28.345,-52.65 18.367,-50.958 20.437,-50.958 22.446,-50.958 24.458,-50.958 26.478,-50.958 28.345,-50.958 18.367,-49.36 20.437,-49.36 22.446,-49.36 24.458,-49.36 26.478,-49.36 28.345,-49.36 18.367,-47.627 20.437,-47.627 22.446,-47.627 24.458,-47.627 26.478,-47.627 28.345,-47.627 18.367,-45.891 20.437,-45.891 22.446,-45.891 24.458,-45.891 26.478,-45.891 28.345,-45.891 18.367,-44.151 20.437,-44.151 22.446,-44.151 24.458,-44.151 26.478,-44.151 28.345,-44.151
NetF1_2: F1.2 F2.2 J10.1 | length 11.3
  Top Layer w1.016: J10.1@7.197,-49.714 9.776,-47.134 13.913,-47.134 F1.2@13.913,-43.667
  other v1: 2.612,-51.049 4.171,-51.049 5.58,-51.049 6.982,-51.049 8.449,-51.049 9.707,-50.741 1.123,-50.639 2.612,-50.118 9.707,-49.645 2.612,-49.223 9.707,-48.635 2.612,-48.265 9.707,-47.633 2.612,-47.401 1.062,-47.369
NetJ14_1: J14.1 U1.14 | length 15.8
  Top Layer w1.016: U1.14@37.061,-35.447 37.061,-35.12 41.478,-30.703 J14.1@41.478,-29.388
  Bottom Layer w1.27: U1.14@37.061,-35.447 37.061,-33.805 J14.1@41.478,-29.388
NetJ14_2: J14.2 U1.13 | length 15.8
  Top Layer w1.27: U1.13@39.601,-35.447 44.018,-31.03 J14.2@44.018,-29.388
  Bottom Layer w1.27: U1.13@39.601,-35.447 39.601,-34.846 44.018,-30.429 J14.2@44.018,-29.388
NetJ14_3: J14.3 U1.12 | length 15.8
  Top Layer w1.27: U1.12@42.141,-35.447 46.558,-31.03 J14.3@46.558,-29.388
  Bottom Layer w1.27: U1.12@42.141,-35.447 42.141,-35.1 46.558,-30.683 J14.3@46.558,-29.388
NetJ14_4: J14.4 U1.11 | length 15.8
  Top Layer w1.27: U1.11@44.681,-35.447 44.717,-35.447 49.098,-31.065 J14.4@49.098,-29.388
  Bottom Layer w1.27: U1.11@44.681,-35.447 49.098,-31.03 J14.4@49.098,-29.388
NetJ15_1: J15.1 U2.14 | length 15.3
  Top Layer w1.27: U2.14@57.381,-35.447 57.381,-34.35 57.446,-34.35 61.214,-30.582 J15.1@61.214,-29.413
  Bottom Layer w1.27: U2.14@57.381,-35.447 57.381,-34.101 61.214,-30.268 J15.1@61.214,-29.413
NetJ15_2: J15.2 U2.13 | length 15.3
  Top Layer w1.27: U2.13@59.921,-35.447 59.921,-34.24 63.754,-30.407 J15.2@63.754,-29.413 J15.2@63.702,-29.413
  Bottom Layer w1.27: U2.13@59.921,-35.447 59.921,-34.173 63.754,-30.34 J15.2@63.754,-29.413
NetJ15_3: J15.3 U2.12 | length 15.2
  Top Layer w1.27: U2.12@62.461,-35.447 62.461,-34.21 66.294,-30.377 J15.3@66.294,-29.413
  Bottom Layer w1.27: U2.12@62.461,-35.447 62.461,-34.237 66.294,-30.404 J15.3@66.294,-29.413
NetJ15_4: J15.4 U2.11 | length 15.2
  Top Layer w1.27: U2.11@65.001,-35.447 65.001,-34.607 68.834,-30.774 J15.4@68.834,-29.413
  Bottom Layer w1.27: U2.11@65.001,-35.447 65.001,-34.542 68.834,-30.709 J15.4@68.834,-29.413
NetJ18_1: J18.1 U4.14 | length 12.7
  Top Layer w1.27: U4.14@37.061,-12.612 37.061,-10.869 J18.1@40.335,-7.595
  Bottom Layer w1.27: U4.14@37.061,-12.612 37.061,-10.869 J18.1@40.335,-7.595